# Altium PCB eps.PcbDoc
Units mil, origin at the board's own origin, x right, y up, seen from the top; angles counter-clockwise.
Board outline 3800 x 3550 mil, 2 copper layers (Top Layer, Bottom Layer); 4 components, 146 nets, 137 pads, 10 vias.
Unrouted connection lines stored in the file: 11.
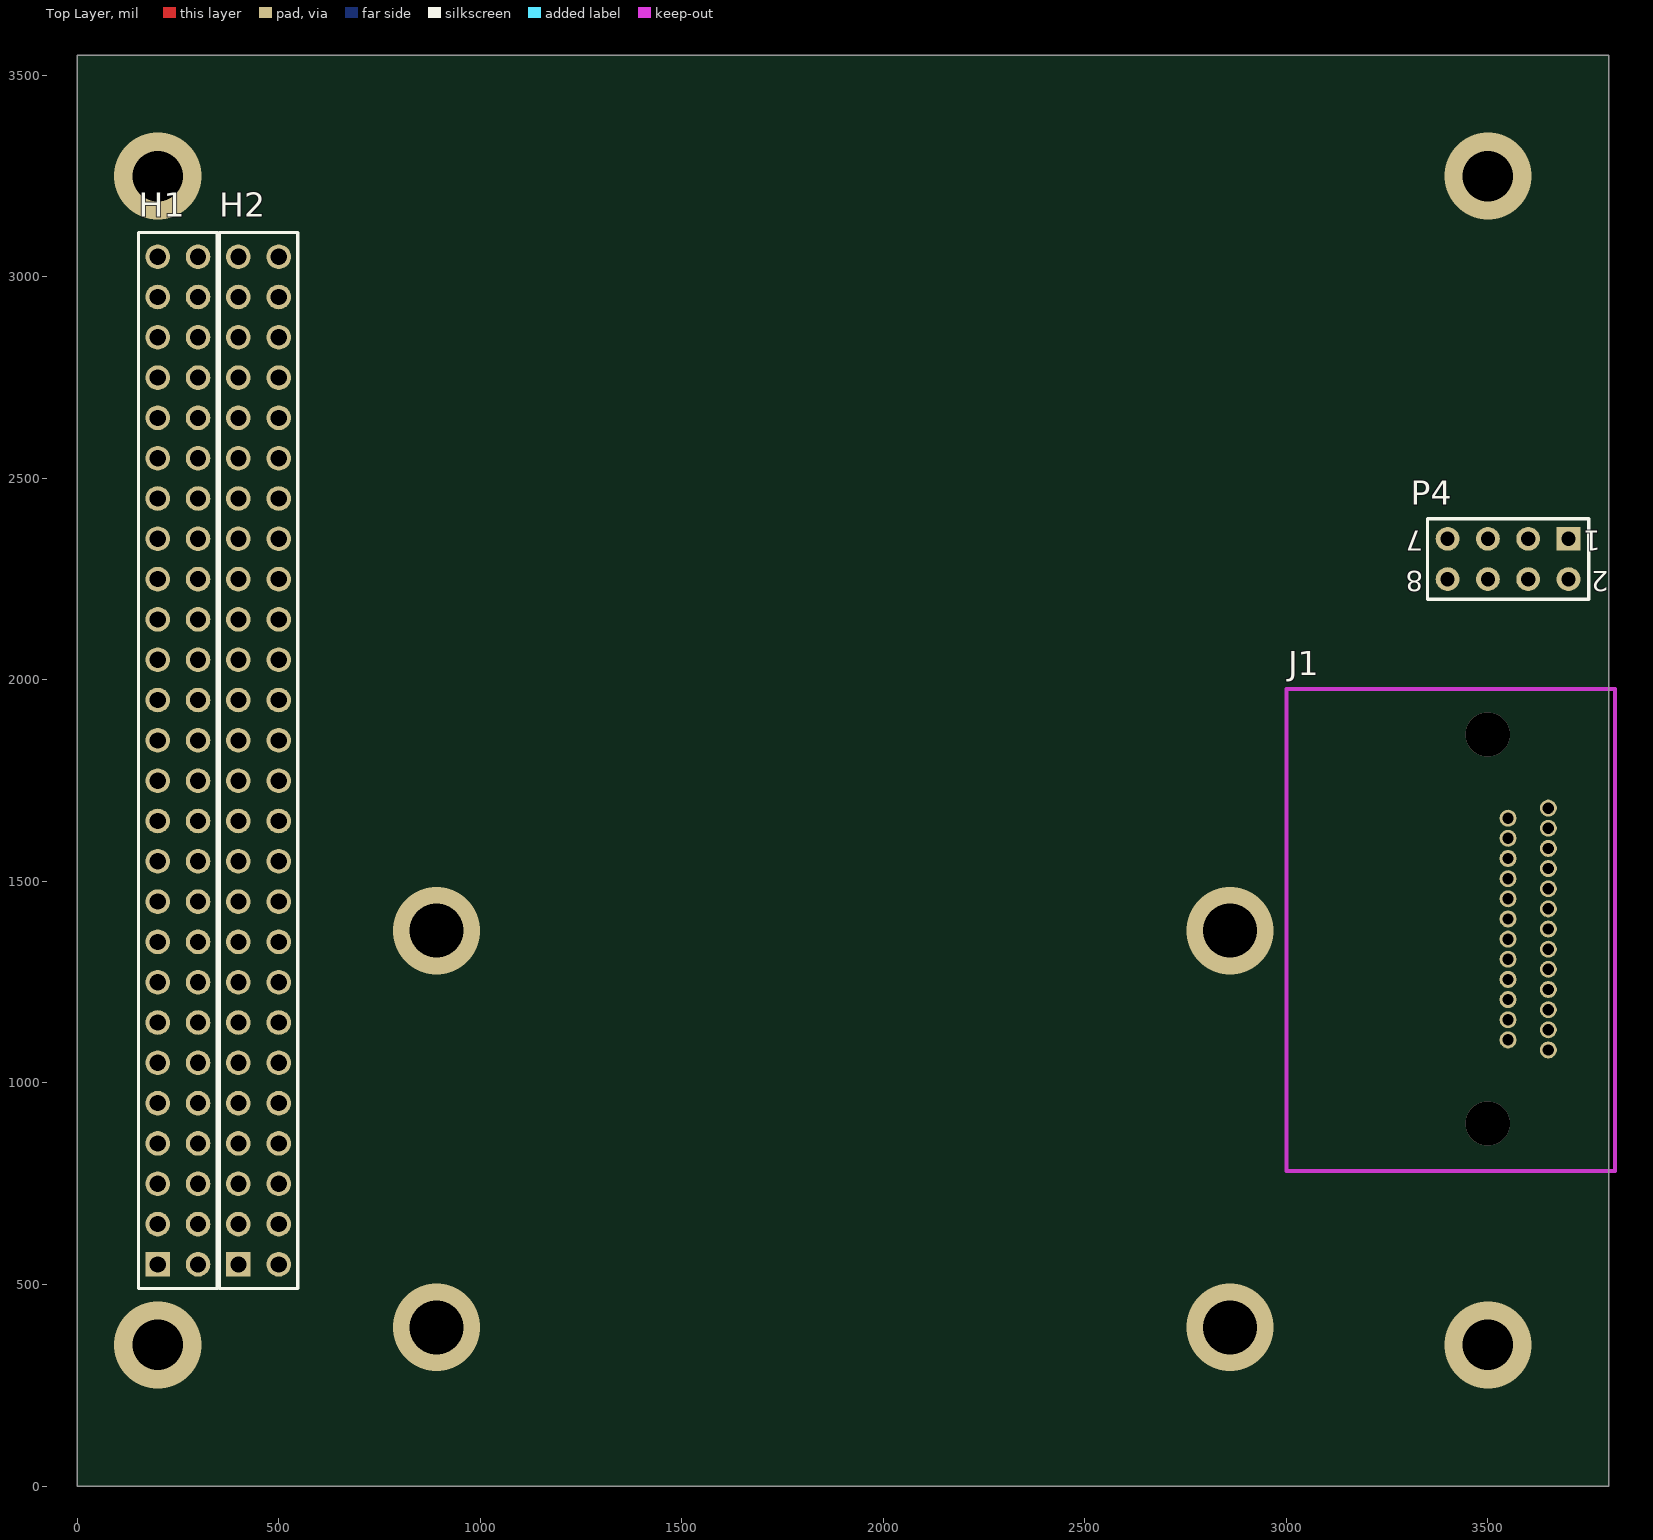
[diagram p0: Top Layer view]
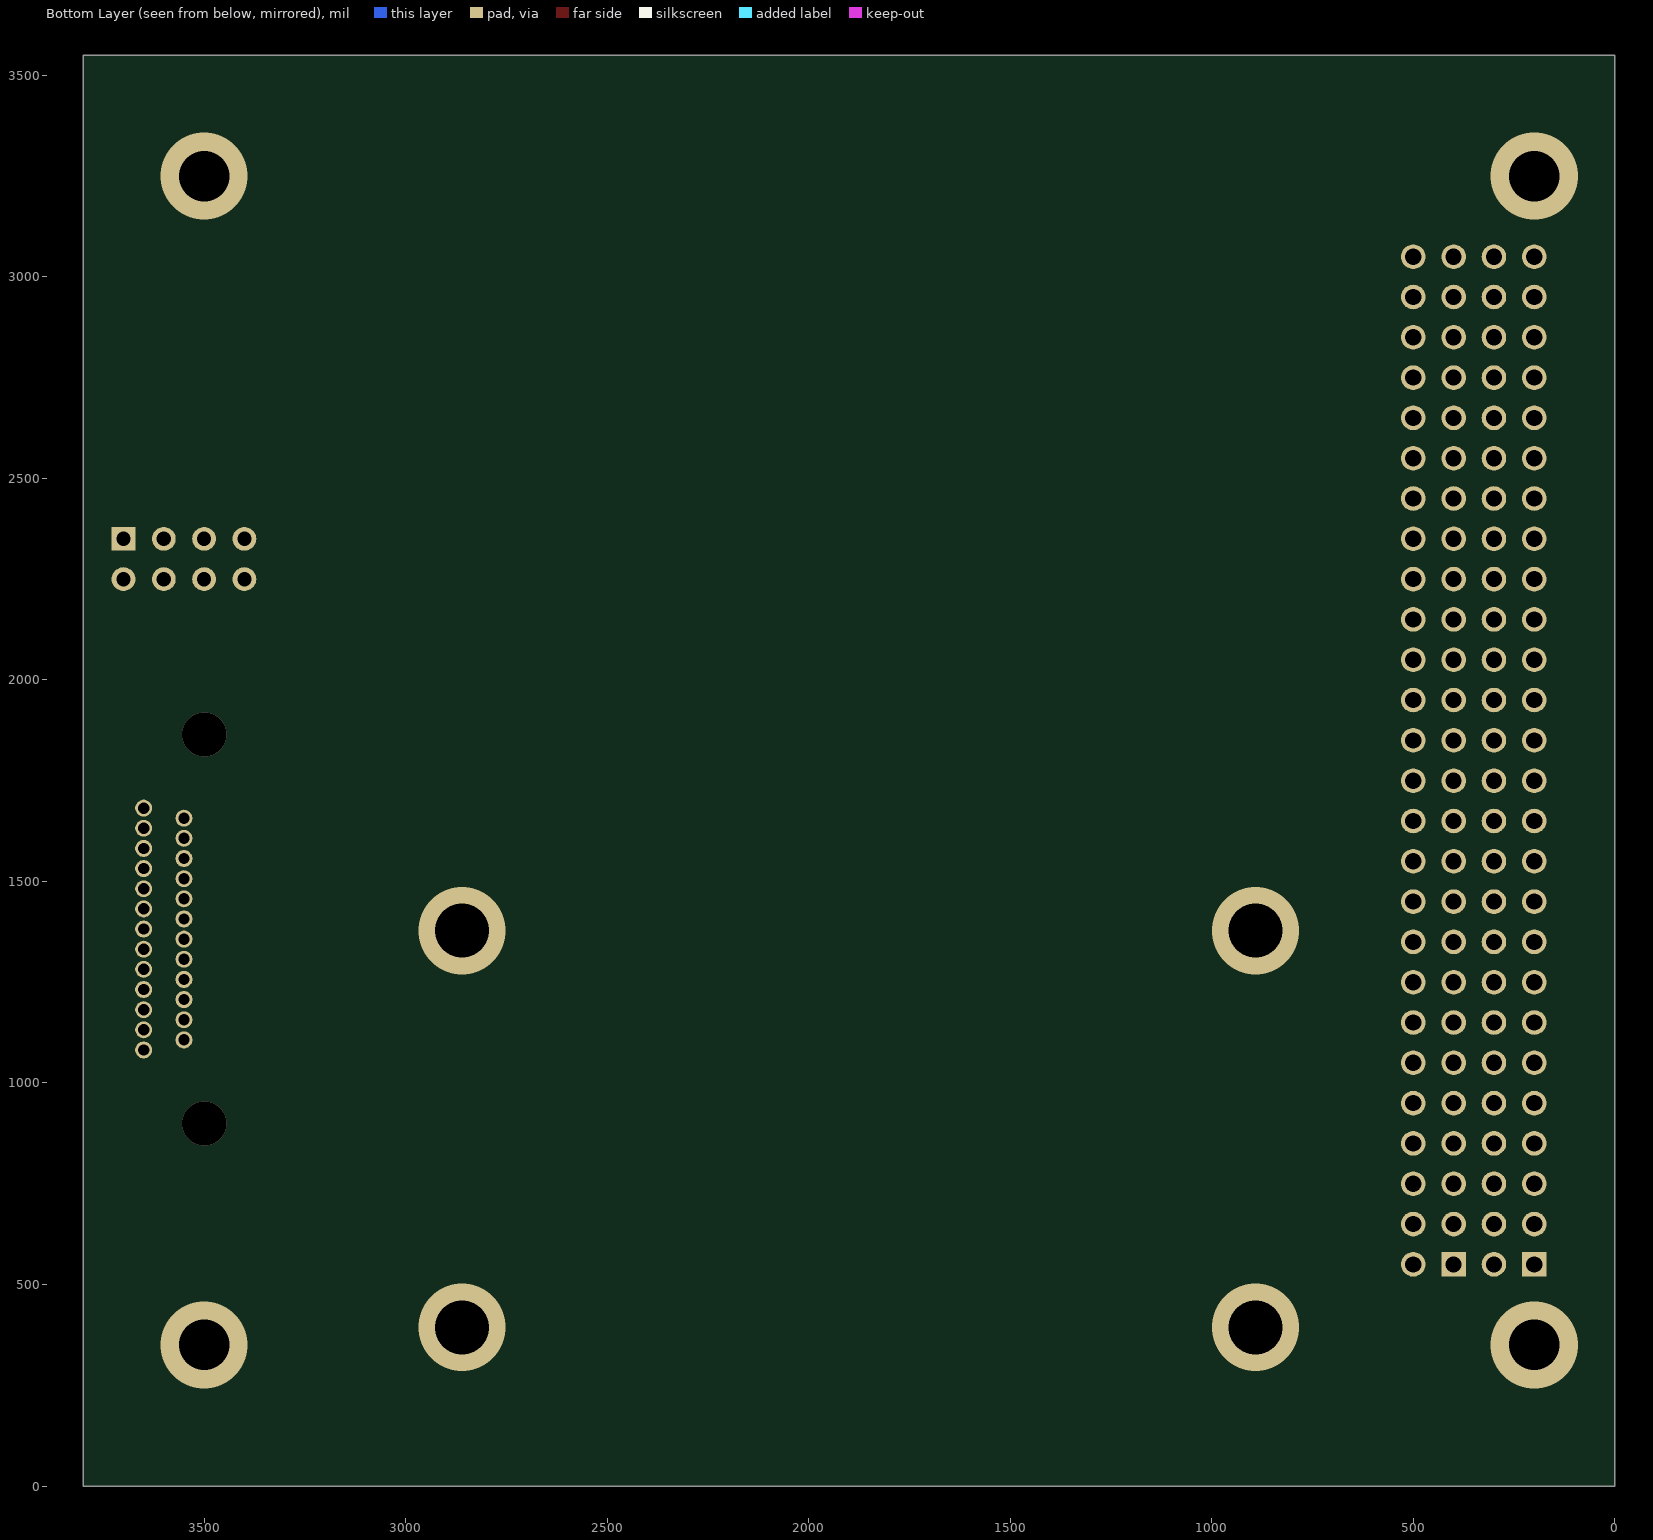
[diagram p1: Bottom Layer view, seen from below]

## Layer stack, top to bottom
Top Solder: solder mask 0.4, Solder Resist, Dk 3.5
Top Layer: signal copper 1.4
Dielectric 1: dielectric 12.6, FR-4, Dk 4.8
Bottom Layer: signal copper 1.4
Bottom Solder: solder mask 0.4, Solder Resist, Dk 3.5

## Board outline
0,0 3800,0 3800,3550 0,3550

## Design rules (kind name [scope] priority, off if disabled: settings)
Clearance [All] p1: gap=10 ignorepadtopadclearanceinfootprint=FALSE except(0: Arc-Hole Track-Hole SMDPad-Hole THPad-Hole Via-Hole Fill-Hole Poly-Hole Region-Hole Text-Hole)
PolygonConnect [All] p1: connectstyle=Relief reliefconductorwidth=10 reliefentries=4 polygonreliefangle="90 Angle" airgapwidth=10
RoomDefinition bus-main [InComponentClass('bus-main')] p1: confinementstyle=ConfineIn formatcopy=TRUE lockcomponents=FALSE outline 132.72,470.12 132.72,3129.88 567.28,3129.88 567.28,2413.94 3818,2413.94 3818,1991.89 3830,1991.89 3830,766.89 567.28,766.89 567.28,470.12
RoutingVias [All] p1: holewidth=28 width=50 viastyle="Through Hole" minholewidth=28 minwidth=50 maxholewidth=28 maxwidth=50
SolderMaskExpansion [All] p1: expansion=4
Width [All] p1: maxlimit=10 minlimit=10 preferedwidth=10
30 further rules are at their usual default settings.

## Classes and differential pairs
channel class eps_bt1: U_eps_bt11 U_eps_bt12
channel class eps_bb1: U_eps_bb11 U_eps_bb12
net class ADC_BTV[1..2]: ADC_BTV1 ADC_BTV2
net class ADC_BBI[1..2]: ADC_BBI1 ADC_BBI2
component class U_eps_pex: U3
component class U_eps_flash: U9
component class U_eps_can_transceiver: U8
component class U_eps_bt12: BT1_U_eps_bt12
component class U_eps_bt11: BT1_U_eps_bt11
component class U_eps_bb12: *5_U_eps_bb12 BB1_U_eps_bb12
component class U_eps_bb11: *5_U_eps_bb11 BB1_U_eps_bb11
component class U_eps_batt: "RBF PIN/DEP SWITCH"
component class U_eps_adc: *2
component class U_eps_32m1: *4 S4 S?
component class Designator: *?

## Components (designator, comment, footprint, x,y, rotation, side; value= is the part's Value field where it differs from the comment)
H1 "ESQ-126-23-G-D" SMTC-ESQ-126-23-X-D 200,550 r90 top
H2 "ESQ-126-23-G-D" SMTC-ESQ-126-23-X-D 400,550 r90 top
J1 "D Connector 25" "Mini DSub Connector" 3650,1381.89 r90 top
P4 "UHF PWR" HDR2X4 3700,2350 r180 top

## Footprints (in the part's own frame and the unit in brackets; to place one, negate y for a bottom-side part, rotate by r counter-clockwise, add the part's x,y. Pads: shape width x height; smd on the part's side, far side on the other; paste and mask are expansions set on the pad)
HDR2X4 [mm] "Connector; Header; 4x2 Position"
  rect 1.5x1.5 hole 0.9: 1(0,0)
  round 1.5 hole 0.9: 2(0,2.54) 3(2.54,0) 4(2.54,2.54) 5(5.08,0) 6(5.08,2.54) 7(7.62,0) 8(7.62,2.54)
  silkscreen extent -1.27,-1.27 8.89,3.81
"Mini DSub Connector" [mil]
  round 42 hole 28: 1(-300,0) 2(-250,0) 3(-200,0) 4(-150,0) 5(-100,0) 6(-50,0) 7(0,0) 8(50,0) 9(100,0) 10(150,0) 11(200,0) 12(250,0) 13(300,0) 14(-275,100) 15(-225,100) 16(-175,100) 17(-125,100) 18(-75,100) 19(-25,100) 20(25,100) 21(75,100) 22(125,100) 23(175,100) 24(225,100) 25(275,100)
  Top Layer keep-out lines w10: -600,650 595,650 595,-165 -600,-165 -600,650
SMTC-ESQ-126-23-X-D [mm] "Elevated Socket, 2x26 Pins, Vertical, 2.54mm Pitch, Female"
  rect 1.55x1.55 hole 1.02: 1(0,0)
  round 1.55 hole 1.02: 2(0,-2.54) 3(2.54,0) 4(2.54,-2.54) 5(5.08,0) 6(5.08,-2.54) 7(7.62,0) 8(7.62,-2.54) 9(10.16,0) 10(10.16,-2.54) 11(12.7,0) 12(12.7,-2.54) 13(15.24,0) 14(15.24,-2.54) 15(17.78,0) 16(17.78,-2.54) 17(20.32,0) 18(20.32,-2.54) 19(22.86,0) 20(22.86,-2.54) 21(25.4,0) 22(25.4,-2.54) 23(27.94,0) 24(27.94,-2.54) 25(30.48,0) 26(30.48,-2.54) 27(33.02,0) 28(33.02,-2.54) 29(35.56,0) 30(35.56,-2.54) 31(38.1,0) 32(38.1,-2.54) 33(40.64,0) 34(40.64,-2.54) 35(43.18,0) 36(43.18,-2.54) 37(45.72,0) 38(45.72,-2.54) 39(48.26,0) 40(48.26,-2.54) 41(50.8,0) 42(50.8,-2.54) 43(53.34,0) 44(53.34,-2.54) 45(55.88,0) 46(55.88,-2.54) 47(58.42,0) 48(58.42,-2.54) 49(60.96,0) 50(60.96,-2.54) 51(63.5,0) 52(63.5,-2.54)
  silkscreen extent -1.53,-3.74 65.03,1.2, body extent -1.53,-3.81 65.02,1.27, height 13.84

## Part data
H1 H2: "PC/104(TM) Elevated Socket Strip, Through-hole, Vertical, -55 to 125 degC, 2.54 mm Pitch, 52-Pin, Female, RoHS", Manufacturer=Samtec, Supplier Part Number 1=92P1348, Temperature Range="-55 to 125 degC", ComponentLink1Description="Manufacturer URL", ComponentLink1URL=http://www.samtec.com, ComponentLink2Description=Datasheet, ComponentLink2URL=http://www.samtec.com/documents/webfiles/pdf/ESQ_TH.PDF, ComponentLink3Description="Package Specification", ComponentLink3URL=http://www.samtec.com/documents/webfiles/cpdf/ESQ-1XX-XX-X-X-XXX-XX-X-XX-MKT.pdf, DatasheetVersion=F-214, Mounting Technology=Through-hole, Orientation=Vertical, PackageDescription="ESQ Strip ASM", PackageReference=ESQ-126-23-X-D, PackageVersion="BZ, 9/1998", PartNumber=ESQ-126-23-G-D, Pitch="2.54 mm", RoHS=True, Supplier 1=Newark
J1: "Receptacle Assembly, 25 Position, Right Angle", PackageDocument=U, ComponentLink1Description="Mini-D25 - Molex, LLC 0836149012", ComponentLink1URL=https://www.digikey.ca/product-detail/en/molex-llc/0836149012/WM2144-ND/1867000, DatasheetDocument=19-Mar-1999, Gender=Receptacle, LatestRevisionDate=17-Jul-2002, LatestRevisionNote="Re-released for DXP Platform.", Orientation="Right Angle", PackageReference=787202, Positions=25, Published=15-Jun-2001, Publisher="Altium Limited"
P4: library part "Header 4X2", "Header, 4-Pin, Dual row", LatestRevisionDate=17-Jul-2002, LatestRevisionNote="Re-released for DXP Platform.", Publisher="Altium Limited"

## Via types
v1: diameter 216.54, hole 133.86, Top Layer to Bottom Layer, 4 vias
v2: diameter 216.54, hole 125.2, Top Layer to Bottom Layer, 4 vias
v3: diameter 110, hole 110, Top Layer to Bottom Layer, 2 vias

## Nets (pads, with @x,y where several pads share a name; then routed paths per layer and width w, separated by ;. In a path a pad name is that pad's centre, name@x,y a point inside that pad or via, vN(x,y) a via of type N, cw(c..) or ccw(c..) an arc to the next point about the centre after c; other vN are vias at no path point)
+3V3: J1.14
+5V: J1.13 J1.21 J1.22 P4.1 P4.2
+PACK: J1.18
+XI: 
+XVgs: 
+YI: 
+YVgs: 
-PACK: 
-XI: 
-XVgs: 
-YI: 
-YVgs: 
A: 
ADC_+PACK: 
ADC_BBI1: 
ADC_BBI2: 
ADC_BBV1: 
ADC_BBV2: 
ADC_BTI: 
ADC_BTV1: 
ADC_BTV2: 
ADC_CH3: 
B: J1.9
BT_OUT: 
C: 
CANH: J1.16
CANL: J1.17
CS_ADC: 
CS_MEM: 
CS_PEX: 
D: J1.15
EPS_MISO_A: 
EPS_MOSI_A: J1.3
EPS_PGM_RST: 
EPS_RX: 
EPS_SCK_A: J1.4
G1: 
G2: 
G3: 
G4: 
GND: J1.1 J1.19 J1.20 J1.25 P4.5 P4.6 P4.7 P4.8
I1: 
I2: 
I3: 
I4: 
LBK: 
MISO: 
MISO_A: J1.2
MOSI: 
Net2_U_eps_bt11_1: 
Net2_U_eps_bt11_2: 
Net2_U_eps_bt12_1: 
Net2_U_eps_bt12_2: 
Net3_U_eps_bt11_2: 
Net3_U_eps_bt12_2: 
Net4_U_eps_bt11_1: 
Net4_U_eps_bt12_1: 
Net6_U_eps_bt11_2: 
Net6_U_eps_bt12_2: 
Net9_U_eps_bt11_2: 
Net9_U_eps_bt12_2: 
Net*4_1: 
Net*4_3: 
Net*5_U_eps_bb11_4: 
Net*5_U_eps_bb12_4: 
Net*7_4: 
Net*7_5: 
Net*8_5: 
Net*9_5: 
Net*10_5: 
Net*11_1: 
Net*12_1: 
Net*13_1: 
Net*16_1: 
Net*17_1: 
Net*18_1: 
Net*20_1: 
Net*21_1: 
Net*23_1: 
Net*25_1: 
Net*26_1: 
Net*27_1: 
Net+BATT1_1: 
Net-BATT1_1: 
NetBB1_U_eps_bb11_1: 
NetBB1_U_eps_bb11_3: 
NetBB1_U_eps_bb11_11: 
NetBB1_U_eps_bb12_1: 
NetBB1_U_eps_bb12_3: 
NetBB1_U_eps_bb12_11: 
NetBT1_U_eps_bt11_1: 
NetBT1_U_eps_bt11_18: 
NetBT1_U_eps_bt11_19: 
NetBT1_U_eps_bt12_1: 
NetBT1_U_eps_bt12_18: 
NetBT1_U_eps_bt12_19: 
NetC25_1: 
NetC38_2: 
NetC44_2: 
NetD7_2: 
NetD8_2: 
NetD9_2: 
NetD10_2: 
NetD11_2: 
NetD12_1: 
"NetDEP. SWITCH1_2": 
NetQ1_2: 
NetQ1_3: 
NetQ2_2: 
NetR11_2: 
NetR12_2: 
NetR13_2: 
NetR15_1: 
NetR16_1: 
NetR17_1: 
NetR18_1: 
NetR19_1: 
NetR34_1: 
NetR36_1: 
NetR37_1: 
NetR39_2: 
NetR47_2: 
NetS4_1: 
NetS?_2: 
OBC_MOSI_A: J1.7
OBC_SCK_A: J1.8
PAY_MOSI_A: J1.11
PAY_SCK_A: J1.12
PEX_A4: 
PEX_A5: 
PEX_A6: 
PEX_A7: 
PEX_B0: 
PEX_B1: 
PEX_B2: 
PEX_B3: 
PEX_B4: 
PEX_B5: 
PEX_B6: 
PEX_B7: 
PEX_RST: 
REF2V5: 
RST_EPS: J1.5
RXCAN: 
SCK: 
TXCAN: 
pads on no net: H1.1 H1.2 H1.3 H1.4 H1.5 H1.6 H1.7 H1.8 H1.9 H1.10 H1.11 H1.12 H1.13 H1.14 H1.15 H1.16 H1.17 H1.18 H1.19 H1.20 H1.21 H1.22 H1.23 H1.24 H1.25 H1.26 H1.27 H1.28 H1.29 H1.30 H1.31 H1.32 H1.33 H1.34 H1.35 H1.36 H1.37 H1.38 H1.39 H1.40 H1.41 H1.42 H1.43 H1.44 H1.45 H1.46 H1.47 H1.48 H1.49 H1.50 H1.51 H1.52 H2.1 H2.2 H2.3 H2.4 H2.5 H2.6 H2.7 H2.8 H2.9 H2.10 H2.11 H2.12 H2.13 H2.14 H2.15 H2.16 H2.17 H2.18 H2.19 H2.20 H2.21 H2.22 H2.23 H2.24 H2.25 H2.26 H2.27 H2.28 H2.29 H2.30 H2.31 H2.32 H2.33 H2.34 H2.35 H2.36 H2.37 H2.38 H2.39 H2.40 H2.41 H2.42 H2.43 H2.44 H2.45 H2.46 H2.47 H2.48 H2.49 H2.50 H2.51 H2.52 J1.6 J1.10 J1.23 J1.24 P4.3 P4.4
copper on no net:
  other v1: 891.73,393.7 2860.24,393.7 891.73,1377.95 2860.24,1377.95
  other v2: 200,350 3500,350 200,3250 3500,3250
  other v3: 3500,899.39 3500,1864.39

## Text inside footprints (layer, text, board x,y; h text height)
P4: Top Overlay "2" at 3800,2270 h50 r180; Top Overlay "1" at 3780,2370 h50 r180; Top Overlay "7" at 3340,2370 h50 r180; Top Overlay "8" at 3340,2270 h50 r180